# Altium PCB AT_Link_ISO_V1.0.PcbDoc
Units mm, origin at the board's own origin, x right, y up, seen from the top; angles counter-clockwise.
Board outline 62.5 x 25.98 mm, 2 copper layers (Top Layer, Bottom Layer); 66 components, 72 nets, 268 pads, 191 vias.
Unrouted connection lines stored in the file: 35.
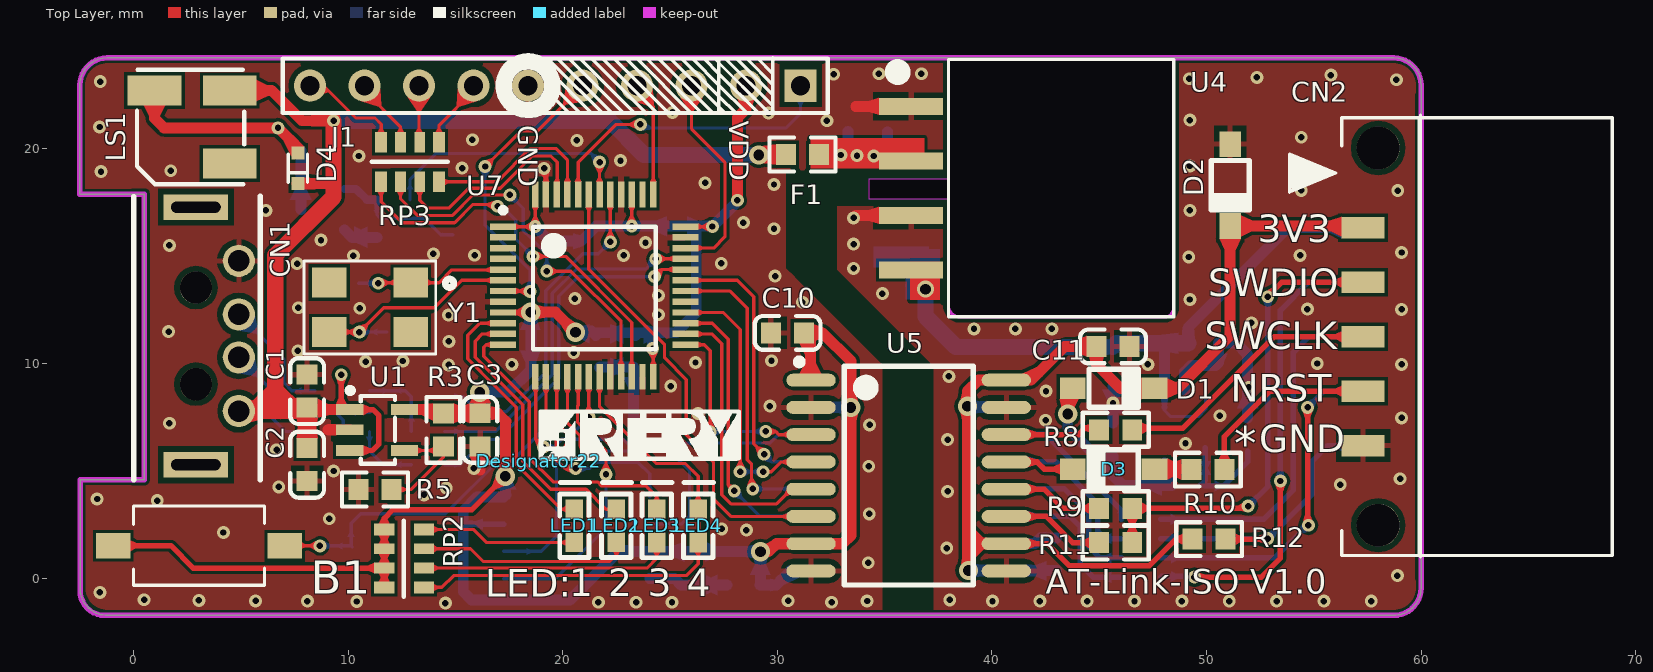
[diagram p0: Top Layer view]
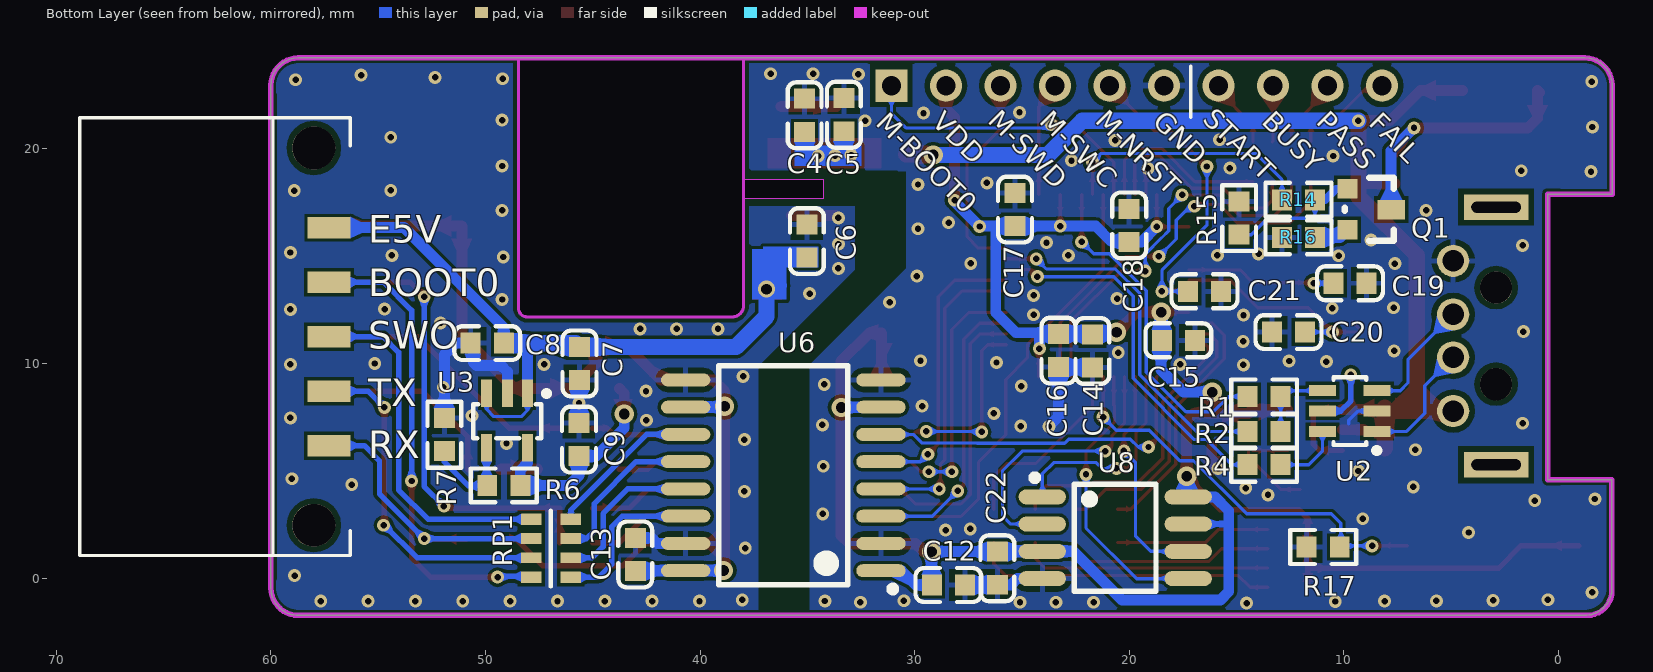
[diagram p1: Bottom Layer view, seen from below]
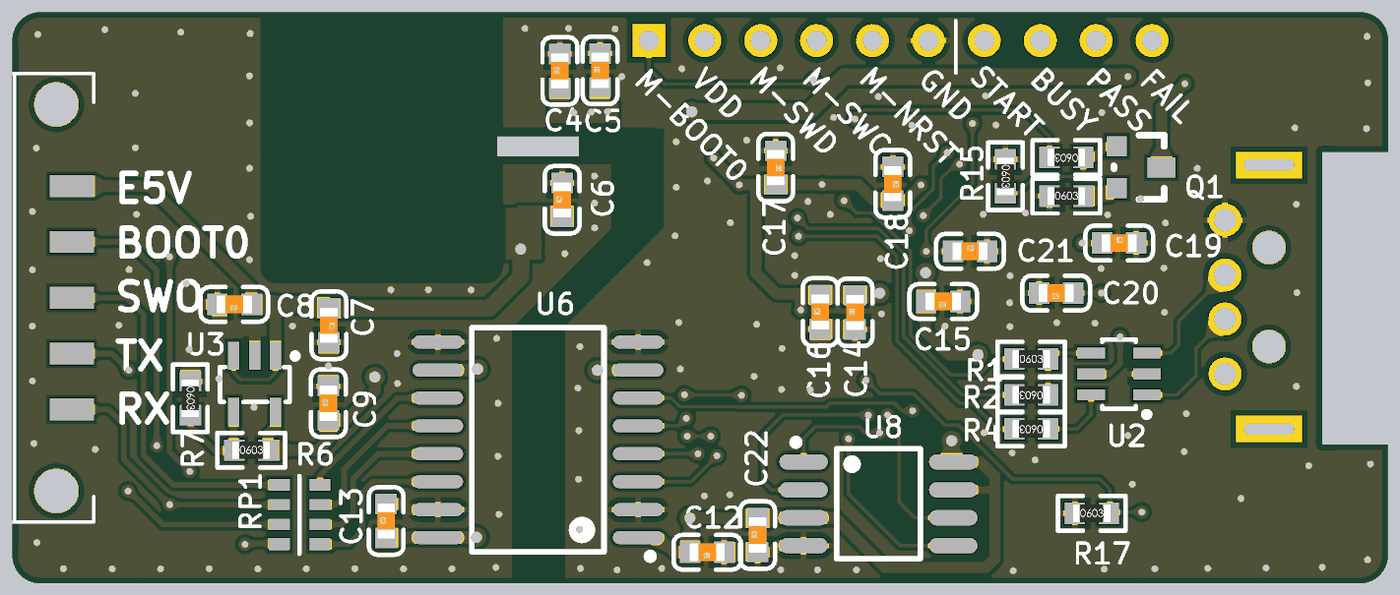
[diagram p2: 3D render of the assembled board from below, using the file's embedded part models]

## Layer stack, top to bottom
Top Solder: solder mask 0.0102, Solder Resist, Dk 3.5
Top Layer: signal copper 0.0356
Dielectric1: dielectric 0.32, FR-4, Dk 4.8
Bottom Layer: signal copper 0.0356
Bottom Solder: solder mask 0.0102, Solder Resist, Dk 3.5

## Board outline
-2.492,-0.469 -2.492,4.58 0.5,4.58 0.5,17.882 -2.5,17.882 -2.5,22.968 cw(c-1.23,22.968) -1.23,24.238 58.73,24.238 cw(c58.73,22.968) 60,22.968 60,-0.469 cw(c58.73,-0.469) 58.73,-1.739 -1.222,-1.739 cw(c-1.222,-0.469)
cut-out: 37.973,24.238 37.973,12.7 ccw(c38.506,12.7) 38.506,12.167 48.041,12.167 ccw(c48.041,12.598) 48.473,12.598 48.473,24.223
cut-out: 34.265,17.678 37.973,17.678 37.973,18.593 34.265,18.593
cut-out: 34.267,18.573

## Design rules (kind name [scope] priority, off if disabled: settings)
BoardOutlineClearance [All] p1: gap=0.254 ignorepadtopadclearanceinfootprint=FALSE except(0: Arc-SplitContinuation Track-SplitContinuation SMDPad-SplitContinuation THPad-SplitContinuation Via-SplitContinuation Fill-SplitContinuation Poly-SplitContinuation Region-SplitContinuation Text-SplitContinuation)
Clearance [All] p1: gap=0.152 ignorepadtopadclearanceinfootprint=FALSE except(0.254: THPad-Poly)
ComponentClearance [All] p1: gap=0.127 collisioncheckmode=3 verticalgap=0.051 showdistances=TRUE
HoleSize [All] p1: absolutevalues=TRUE maxlimit=5 minlimit=0.3 maxpercent=80.000 minpercent=20.000
MinimumAnnularRing [All] p1: minimumring=0.102
MinimumSolderMaskSliver [All] p1: minsoldermaskwidth=0.076
PolygonConnect [All] p1: thpad.connectstyle=Relief thpad.reliefconductorwidth=0.254 thpad.reliefentries=4 thpad.polygonreliefangle="90 Angle" thpad.airgapwidth=0.254 smdpad.connectstyle=Relief smdpad.reliefconductorwidth=0.254 smdpad.reliefentries=4 smdpad.polygonreliefangle="90 Angle" smdpad.airgapwidth=0.254 via.connectstyle=Direct via.reliefconductorwidth=0.254 via.reliefentries=4 via.polygonreliefangle="90 Angle" via.airgapwidth=0.254
RoutingVias [All] p1: holewidth=0.3 width=0.6 viastyle="Through Hole" minholewidth=0.3 minwidth=0.6 maxholewidth=1.27 maxwidth=2.54
SilkToSilkClearance [All] p1: silktosilkclearance=0.025
SilkToSolderMaskClearance [IsPad] p1: minsilkscreentomaskgap=0.025 clearancetoexposedcopper=TRUE
SolderMaskExpansion [All] p1: expansion=0.051
Width [All] p1: maxlimit=2.54 minlimit=0.152 preferedwidth=0.152
25 further rules are at their usual default settings.

## Classes and differential pairs
component class 1-AT_Link-ISO_Interface: C1 C2 C3 C4 C5 C6 C7 C8 C9 C10 C11 C12 C13 CN1 CN2 D1 D2 D3 F1 R1 R2 R3 R4 R5 R6 R7 R8 R9 R10 R11 R12 RP1 U1 U2 U3 U4 U5 U6
component class 2-AT_Link-ISO_MCU: B1 C14 C15 C16 C17 C18 C19 C20 C21 C22 D4 J1 LED1 LED2 LED3 LED4 LS1 Q1 R14 R15 R16 R17 RP2 RP3 U7 U8 Y1

## Components (designator, comment, footprint, x,y, rotation, side; value= is the part's Value field where it differs from the comment)
B1 "Button,SMD_2P" Button_3*6*2.5 3.051,1.508 r0 top locked
C1 "10uF" 0603_c 8.09,8.71 r90 top
C2 "0.1uF" 0603_c 8.09,5.282 r270 top
C3 "10uF" 0603_c 16.154,6.909 r270 top
C4 "10uF" 0603_c 35.128,21.566 r90 bottom
C5 "0.1uF" 0603_c 33.299,21.59 r90 bottom
C6 "10uF" 0603_c 35.022,15.702 r90 bottom
C7 "10uF" 0603_c 45.618,9.997 r270 bottom
C8 "0.1uF" 0603_c 49.919,10.947 r0 bottom
C9 "10uF" 0603_c 45.645,6.452 r90 bottom
C10 "0.1uF" 0603_c 30.48,11.424 r0 top
C11 "0.1uF" 0603_c 45.644,10.795 r0 top
C12 "0.1uF" 0603_c 28.432,-0.325 r0 bottom
C13 "0.1uF" 0603_c 43.021,1.096 r90 bottom
C14 "4.7uF" 0603_c 21.718,10.583 r90 bottom value=4.7uf
C15 "0.1uF" 0603_c 17.713,11.078 r0 bottom value=0.1uf
C16 "0.1uF" 0603_c 23.297,10.6 r90 bottom value=0.1uf
C17 "0.1uF" 0603_c 25.324,17.17 r270 bottom value=0.1uf
C18 "0.1uF" 0603_c 20.004,16.434 r270 bottom value=0.1uf
C19 "22pF" 0603_c 9.717,13.737 r180 bottom
C20 "22pF" 0603_c 12.581,11.463 r0 bottom
C21 "0.1uF" 0603_c 16.495,13.36 r180 bottom
C22 "0.1uF" 0603_c 26.145,0.458 r90 bottom value=0.1uf
CN1 "USB-A 90°弯针" "USB_A - DIP" 4.907,14.782 r270 top locked
CN2 "CON1" SWD_2*5P_SMT 57.302,11.25 r270 top locked
D1 "DFLS130L" SOD-123 45.669,8.839 r180 top
D2 "SMF3.3A" SOD-123 51.105,18.313 r90 top
D3 "DFLS130L" SOD-123 45.669,5.08 r0 top
D4 "RB521S-30" SOD-523 7.662,19.093 r90 top
Designator22 "Comment" log_small 18.889,5.475 r0 top
F1 "SMD0603B025TF" 0603_r 31.173,19.736 r180 top
J1 "NC" HDR1X10 31.083,22.944 r180 top locked
LED1 "RED" LED0603 20.551,1.661 r90 top
LED2 "GREEN" LED0603 22.506,1.661 r90 top
LED3 "BLUE" LED0603 24.386,1.66 r90 top
LED4 "YELLOW" LED0603 26.317,1.66 r90 top
LS1 "MLT-5030贴片无源蜂鸣器" "BUZZER - 5030" 4.479,22.715 r90 top
Q1 "S8050" SOT-23 9.834,18.138 r270 bottom
R1 "NC" 0603_r 13.716,8.458 r180 bottom
R2 "22R" 0603_r 13.716,6.832 r0 bottom
R3 "47K" 0603_r 14.441,6.904 r90 top
R4 "22R" 0603_r 13.716,5.282 r0 bottom
R5 "15K" 0603_r 11.252,4.128 r0 top
R6 "51K" 0603_r 49.149,4.318 r180 bottom
R7 "15K" 0603_r 51.918,6.68 r270 bottom
R8 "100R" 0603_r 45.771,6.909 r180 top
R9 "470R" 0603_r 45.771,3.251 r180 top
R10 "100R" 0603_r 50.063,5.055 r180 top
R11 "100R" 0603_r 45.771,1.651 r180 top
R12 "100K" 0603_r 50.123,1.816 r0 top
R14 "470R" 0603_r 12.116,17.628 r0 bottom
R15 "100K" 0603_r 14.884,16.772 r270 bottom
R16 "33R" 0603_r 12.116,15.875 r180 bottom
R17 "100K" 0603_r 10.962,1.446 r180 bottom
RP1 "100R" 0603*4,8P4R 46.025,0.04 r90 bottom
RP2 "1K" RP_4-0603 13.534,-0.435 r180 top
RP3 "100R" 0603*4,8P4R 11.538,18.466 r0 top
U1 "RT9080N-08GJ5" SOT-23-5#1 11.733,5.308 r0 top
U2 "USBLC6-2SC6" SOT-23-6 9.725,7.782 r180 bottom
U3 "RT9080N-08GJ5" SOT-23-5#2 48.997,7.341 r90 bottom
U4 "B0505S-1WR3" B0505S-1WR3-B 35.433,18.167 r270 top locked
U5 "ADUM1401CRW" SOIC-16_300mil 36.123,4.775 r270 top locked
U6 "ADUM1402CRW" SOIC-16_300mil 36.123,4.788 r90 bottom locked
U7 "AT32F403CGT6" "LQFP48 - 2" 17.218,16.375 r0 top locked
U8 "W25Q128" SOIC-8_208mil 20.654,1.878 r270 bottom locked
Y1 "8MHz" XTAL_5032 12.92,13.763 r180 top locked

## Footprints (in the part's own frame and the unit in brackets; to place one, negate y for a bottom-side part, rotate by r counter-clockwise, add the part's x,y. Pads: shape width x height; smd on the part's side, far side on the other; paste and mask are expansions set on the pad)
0603*4,8P4R [mm] "贴片排阻，0603*4，8P4R"
  rect 0.55x0.95 smd: 1(0,0) 4(2.7,0) 5(2.7,1.85) 8(0,1.85)
  rect 0.5x0.95 smd: 2(0.9,0) 3(1.8,0) 6(1.8,1.85) 7(0.9,1.85)
  silkscreen extent -0.43,0.94 3.1,0.94
0603_c [mm]
  rect 0.93x0.98 smd: 1(-0.77,0) 2(0.77,0)
  silkscreen extent -1.53,-0.79 1.54,0.79, body extent -0.8,-0.4 0.8,0.4, height 0.3
0603_r [mm]
  rect 0.93x0.98 smd: 1(-0.77,0) 2(0.77,0)
  silkscreen extent -1.53,-0.79 1.54,0.79, body extent -0.85,-0.4 0.85,0.4, height 0.56
B0505S-1WR3-B [mm] "B0505S-1WR3 5V 1W  Isolation power module"
  rect 0.8x3 smd: 1(-3.81,0.8) 2(-1.27,0.8) 3(1.27,0.8) 4(3.81,0.8)
  silkscreen extent -6,0.08 5.99,13.04
Button_3*6*2.5 [mm] "Button"
  rect 1.6x1.2 smd: 1(-4,0) 2(4,0)
  silkscreen extent -3.05,-1.85 3.05,1.85
"BUZZER - 5030" [mm]
  rect 1.4x2.5 smd: 1(0,0) 2(0,3.5) 3(-3.4,0)
  silkscreen extent -4.37,-0.69 0.97,4.32
HDR1X10 [mm] "Connector; Header; 10 Position"
  rect 1.5x1.5 hole 0.9: 1(0,0)
  round 1.5 hole 0.9: 2(2.54,0) 3(5.08,0) 4(7.62,0) 5(10.16,0) 6(12.7,0) 7(15.24,0) 8(17.78,0) 9(20.32,0) 10(22.86,0)
  silkscreen extent -1.27,-1.27 24.13,1.27
LED0603 [mil]
  rect 36x32 smd: 1(-0.04,0.2) 2(60.96,0.2)
  silkscreen extent -28,-28 110,27
log_small [mm]
  silkscreen extent 0.08,0.08 9.32,2.29
"LQFP48 - 2" [mm] "DPIN-0.5"
  rect 1.2x0.3 smd: 1(0,0) 2(0,-0.5) 3(0,-1) 4(0,-1.5) 5(0,-2) 6(0,-2.5) 7(0,-3) 8(0,-3.5) 9(0,-4) 10(0,-4.5) 11(0,-5) 12(0,-5.5) 25(8.5,-5.5) 26(8.5,-5) 27(8.5,-4.5) 28(8.5,-4) 29(8.5,-3.5) 30(8.5,-3) 31(8.5,-2.5) 32(8.5,-2) 33(8.5,-1.5) 34(8.5,-1) 35(8.5,-0.5) 36(8.5,0)
  rect 0.3x1.2 smd: 13(1.5,-7) 14(2,-7) 15(2.5,-7) 16(3,-7) 17(3.5,-7) 18(4,-7) 19(4.5,-7) 20(5,-7) 21(5.5,-7) 22(6,-7) 23(6.5,-7) 24(7,-7) 37(7,1.5) 38(6.5,1.5) 39(6,1.5) 40(5.5,1.5) 41(5,1.5) 42(4.5,1.5) 43(4,1.5) 44(3.5,1.5) 45(3,1.5) 46(2.5,1.5) 47(2,1.5) 48(1.5,1.5)
  silkscreen extent -0.12,-5.71 7.11,0.89
RP_4-0603 [mm]
  rect 0.95x0.55 smd: 1(0,0) 4(0,-2.7) 5(1.85,-2.7) 8(1.85,0)
  rect 0.95x0.5 smd: 2(0,-0.9) 3(0,-1.8) 6(1.85,-1.8) 7(1.85,-0.9)
  silkscreen extent 0.94,-3.1 0.94,0.43
SOD-123 [mm]
  rect 1.2x1 smd: 1(1.905,0) 2(-1.905,0)
  silkscreen extent -1.14,-0.89 1.14,0.89
SOD-523 [mm] "SOD-523"
  rect 0.6x0.6 smd: 1(0.71,0) 2(-0.71,0)
  silkscreen extent -0.65,-0.45 0.65,0.45
SOIC-8_208mil [mm]
  oval 0.7x2.2 smd: 1(-1.905,-3.4) 2(-0.635,-3.4) 3(0.635,-3.4) 4(1.905,-3.4) 5(1.905,3.4) 6(0.635,3.4) 7(-0.635,3.4) 8(-1.905,3.4)
  silkscreen extent -2.95,-3.9 2.5,1.9
SOIC-16_300mil [mm]
  oval 0.6x2.3 smd: 1(-4.445,-4.55) 2(-3.175,-4.55) 3(-1.905,-4.55) 4(-0.635,-4.55) 5(0.635,-4.55) 6(1.905,-4.55) 7(3.175,-4.55) 8(4.445,-4.55) 9(4.445,4.55) 10(3.175,4.55) 11(1.905,4.55) 12(0.635,4.55) 13(-0.635,4.55) 14(-1.905,4.55) 15(-3.175,4.55) 16(-4.445,4.55)
  silkscreen extent -5.45,-5.25 5.1,3
SOT-23 [mil]
  rect 36x36 smd: 1(0.11,0.15) 2(75.11,0.15)
  rect 36x50 smd: 3(38.11,80.15)
  silkscreen extent -20,-5 95,85
SOT-23-5#1 [mil]
  rect 50x20 smd: 1(-65,100) 2(-65,63) 3(-65,25) 4(35,25) 5(35,100)
  silkscreen extent -65,1 18,135
SOT-23-5#2 [mil]
  rect 50x20 smd: 1(50,-37.5) 2(50,-0.5) 3(50,37.5) 4(-50,37.5) 5(-50,-37.5)
  silkscreen extent -33,-72 50,62
SOT-23-6 [mil]
  rect 50x20 smd: 1(50,-37.4) 2(50,0) 3(50,37.4) 4(-50,37.4) 5(-50,0) 6(-50,-37.4)
  silkscreen extent -30,-72 50,62
SWD_2*5P_SMT [mm]
  rect 1x2 smd: 1(-5.08,0) 3(-2.54,0) 5(0,0) 7(2.54,0) 9(5.08,0)
  rect 1x2 smd far side: 2(-5.08,0) 4(-2.54,0) 6(0,0) 8(2.54,0) 10(5.08,0)
  silkscreen extent -10.2,-3.43 10.2,11.6
"USB_A - DIP" [mm]
  round 1.5 hole 1: 1(7,0) 2(4.5,0) 3(2.5,0) 4(0,0)
  rect 1.2x3 hole 0.52 slot 2.3 at 90 deg: 5(-2.5,-2) 6(9.5,-2)
  round 1.5 hole 1.5: 7(1.25,-2) 8(5.75,-2)
  silkscreen extent -3,-4.9 10.2,1
XTAL_5032 [mm]
  rect 1.6x1.4 smd: 1(0,0) 2(3.8,0) 3(3.8,2.3) 4(0,2.3)
  silkscreen extent -2,-1.02 4.98,3.33

## Part data
B1: library part Push_Bottom,Blue,SMD_2P, "两脚SMT贴片轻触开关3.5*6*5  黑色"
C1 C3 C4 C6 C7 C9: library part 0.1uF,50V,20%,SMD0603, "贴片陶瓷电容 10uF,16V,10%,X7R,SMD0603"
C2 C5 C8 C10 C11 C12 C13 C21: library part 0.1uF,50V,20%,SMD0603, "贴片陶瓷电容 0.1uF,16V,10%,X7R,SMD0603"
C14: library part "Cap Semi", "贴片陶瓷电容4.7uF,16V,10%,X7R,SMD0603", LatestRevisionDate=29-May-2009, LatestRevisionNote="IPC-7351 Footprint Added.", PackageDescription="Chip Capacitor", PackageReference=C1206, Published=8-Jun-2000, Publisher="Altium Limited"
C15 C16 C17 C18 C22: library part "Cap Semi", "贴片陶瓷电容 0.1uF,16V,10%,X7R,SMD0603", LatestRevisionDate=29-May-2009, LatestRevisionNote="IPC-7351 Footprint Added.", PackageDescription="Chip Capacitor", PackageReference=C1206, Published=8-Jun-2000, Publisher="Altium Limited"
C19 C20: library part 10pF,50V,5%,SMD0603, "贴片陶瓷电容 22pF,50V,5%,COG,SMD0603"
CN1: library part "Header 4", "USB-A公头 /90°脚/直插式", LatestRevisionDate=17-Jul-2002, LatestRevisionNote="Re-released for DXP Platform.", Publisher="Altium Limited"
CN2: library part CON10A_0, "简易牛角DC3-10P 直针 2.54mm 2*5P双排 黑色"
D1 D3: library part Diode, "贴片二极管 DFLS130L-7", Code_JEDEC=DO-214-AB, LatestRevisionDate=17-Jul-2002, LatestRevisionNote="Re-released for DXP Platform.", PackageDescription="DO-214-AB/SMC; 2 C-Bend Leads; Body 7.9 x 5.9 mm, inc. leads (LxW)", PackageReference=SMC, PackageVersion=Sep-1996, Published=8-Jun-2000, Publisher="Altium Limited"
D2: "TVS管SMF3.3A"
D4: library part Diode, "贴片二极管 RB521S-30 SOD-523", Code_JEDEC=DO-214-AB, LatestRevisionDate=17-Jul-2002, LatestRevisionNote="Re-released for DXP Platform.", PackageDescription="DO-214-AB/SMC; 2 C-Bend Leads; Body 7.9 x 5.9 mm, inc. leads (LxW)", PackageReference=SMC, PackageVersion=Sep-1996, Published=8-Jun-2000, Publisher="Altium Limited"
F1: library part "Fuse 1", "SMD0603B025TF 可恢复保险丝", LatestRevisionDate=17-Jul-2002, LatestRevisionNote="Re-released for DXP Platform.", PackageDescription="Thru-Hole; 2 Leads", PackageReference=PIN-W2/E2.8, Published=8-Jun-2000, Publisher="Altium Limited"
J1: library part "Header 10", "单排直插针2.54mm", LatestRevisionDate=17-Jul-2002, LatestRevisionNote="Re-released for DXP Platform.", Publisher="Altium Limited"
LED1: library part RED,SMD0603, "贴片LED  红色 0603"
LED2: library part GREEN,SMD0603, "贴片LED  绿色 0603"
LED3: library part RED,SMD0603, "贴片LED  蓝色 0603"
LED4: library part YELLOW,SMD0603, "贴片LED  黄色 0603"
LS1: library part Bell, LatestRevisionDate=17-Jul-2002, LatestRevisionNote="Re-released for DXP Platform.", PackageReference=PIN2, Published=24-Mar-1999, Publisher="Altium Limited"
Q1: library part NPN, "三极管SS8050 SOT-23"
R1: library part 10K,1/10W,1%,SMD0603_Dup1
R2 R4: library part 22,1/10W,1%,SMD0603, "贴片电阻 22R 5% 1/10W 0603"
R3: library part 470,1/10W,1%,SMD0603, "贴片电阻 47K 1% 1/10W 0603"
R5 R7: library part 470,1/10W,1%,SMD0603, "贴片电阻 15K 1% 1/10W 0603"
R6: library part 470,1/10W,1%,SMD0603, "贴片电阻 51K 1% 1/10W 0603"
R8 R10 R11: library part 22,1/10W,1%,SMD0603, "贴片电阻 100R 5% 1/10W 0603"
R9: library part 22,1/10W,1%,SMD0603, "贴片电阻 470R 5% 1/10W 0603"
R12: library part 22,1/10W,1%,SMD0603, "贴片电阻 100K 5% 1/10W 0603"
R14: library part 470,1/10W,1%,SMD0603, "贴片电阻 470R 5% 1/10W 0603"
R15: library part 470,1/10W,1%,SMD0603, "贴片电阻 100K 5% 1/10W 0603"
R16: library part 470,1/10W,1%,SMD0603, "贴片电阻 33R 5% 1/10W 0603"
R17: library part 10K,1/10W,1%,SMD0603, "贴片电阻 100K 5% 1/10W 0603"
RP1 RP3: library part 22,1/16W,5%,8P4R, "贴片排阻 100R 5% 1/16W 0603"
RP2: library part 22,1/16W,5%,8P4R, "贴片排阻 1K 5% 1/16W 0603"
U1 U3: library part RT9080N
U7: library part LQFP48&QFN48
U8: library part W25Q128FVSIQ,SOIC8_1, "W25Q128JVSIQTR"
Y1: library part "SMD-5032_4P  8MHZ 20PF 10PPM", "无源晶振8MHz TZ0211E 5032_4,20pF,20PPM", Package=SMD-3225_4P, SuppliersPartNumber=C9002, ComponentLink1Description=供应商链接, ComponentLink1URL=http://www.szlcsc.com/product/details_9522.html, Supplier=LC

## Free pads (board coordinates)
  round 2 hole 2: 0(58,2.46) 0(58,20.04)

## Via types
v1: diameter 0.6, hole 0.3, Top Layer to Bottom Layer, tented both sides, 180 vias
v2: diameter 0.9, hole 0.5, Top Layer to Bottom Layer, tented both sides, 10 vias
v3: diameter 0.8, hole 0.5, Top Layer to Bottom Layer, tented both sides, 1 vias

## Nets (pads, with @x,y where several pads share a name; then routed paths per layer and width w, separated by ;. In a path a pad name is that pad's centre, name@x,y a point inside that pad or via, vN(x,y) a via of type N, cw(c..) or ccw(c..) an arc to the next point about the centre after c; other vN are vias at no path point)
5V_ISO: C6.1 C7.1 C8.1 CN2.2 U3.1 U3.3 U4.4 | length 31.5
  Bottom Layer w0.152: U3.1 48.044,7.819 48.338,7.525 49.616,7.525 49.949,7.858 U3.3
  Bottom Layer w0.254: 47.923,10.947 48.044,10.826
  Bottom Layer w0.508: U3.1 48.044,10.826 ; C8.1 49.149,11.675 53.803,16.33 CN2.2
  Bottom Layer w0.762: 36.326,13.629 36.493,13.462 v3(36.906,13.462) 36.906,12.19 38.326,10.77 C7.1@45.348,10.77 ; C7.1 45.799,10.947 47.923,10.947 C8.1
ATLK_BOOT0: U6.3 U7.27 | length 13.6
  Top Layer w0.152: U7.27 26.974,11.875 27.713,11.136 27.713,4.342 v1(27.991,4.064)
  Bottom Layer w0.152: v1(27.991,4.064) 29.172,2.883 U6.3
ATLK_NRST: U5.4 U7.28 | length 13
  Top Layer w0.152: U7.28 27.478,12.375 28.27,11.582 v1(28.27,4.953) ; v1(29.342,4.953) 29.723,4.953 30.18,5.41 U5.4
  Bottom Layer w0.152: v1(28.27,4.953) v1(29.342,4.953)
ATLK_RX: U6.5 U7.31 | length 13.4
  Top Layer w0.152: U7.31 28.137,13.875 28.905,13.106 28.905,6.248 v1(29.388,5.766)
  Bottom Layer w0.152: v1(29.388,5.766) 29.731,5.423 U6.5
ATLK_SWCLK: U5.3 U7.25 | length 10.2
  Top Layer w0.152: U7.25 26.59,10.875 26.873,10.592 v1@26.873,6.68 ; v1(29.464,6.833) 29.919,6.833 30.072,6.68 U5.3 U5.3@31.421,6.833
  Bottom Layer w0.152: v1(26.873,6.807) 26.924,6.756 27,6.833 v1(29.464,6.833)
ATLK_SWDIO_I: U5.6 U7.43 | length 21.5
  Top Layer w0.152: U7.43 21.218,14.39 24.387,11.221 24.405,11.221 24.745,10.882 24.745,10.256 25.756,9.246 25.756,6.68 27.026,5.41 27.026,3.685 27.84,2.87 U5.6
ATLK_SWDIO_O: U5.5 U7.26 | length 13.5
  Top Layer w0.152: U7.26 26.954,11.375 27.408,10.92 27.408,3.884 27.84,3.453 29.967,3.453 30.655,4.14 U5.5
ATLK_SWO: U6.6 U7.13 | length 16.3
  Top Layer w0.152: U7.13 18.745,9.348 18.745,6.466 v1(19.105,6.106)
  Bottom Layer w0.152: v1(19.105,6.106) 19.589,6.106 19.955,6.472 22.822,6.472 23.016,6.279 27.092,6.279 27.108,6.294 29.673,6.294 30.072,6.693 U6.6
ATLK_TX: U6.4 U7.30 | length 14.5
  Top Layer w0.152: U7.30 27.798,13.375 28.6,12.573 28.6,5.507 28.799,5.309 28.799,4.208 v1(28.854,4.153)
  Bottom Layer w0.152: v1(28.854,4.153) U6.4
BOOT0: J1.1 U7.44 | length 14
  Top Layer w0.152: U7.44 20.718,19.372 22.485,21.139 v1(23.622,21.139)
  Bottom Layer w0.152: v1(23.622,21.139) 23.794,20.968 30.385,20.968 31.083,21.666 J1.1@31.083,22.715
BUZZ: R14.2 U7.42 | length 12
  Top Layer w0.152: U7.42 v1(21.718,19.38)
  Bottom Layer w0.152: R14.2 12.886,18.575 14.097,19.787 21.312,19.787 v1(21.718,19.38)
DM: CN1.2 U2.1 | length 5.7
  Bottom Layer w0.152: CN1.2 6.227,8.962 6.227,7.685 7.08,6.832 U2.1
DP: CN1.3 U2.3 | length 5.7
  Bottom Layer w0.152: CN1.3 7.014,10.176 7.014,9.089 7.371,8.732 U2.3
EGND: C6.2 C7.2 C8.2 C9.2 C11.2 C13.2 CN2.9 D2.1 R7.1 U3.2 U4.3 U5.9 U5.15 U6.9 U6.15 | length 14.6
  Top Layer w0.508: v1(33.553,16.784) 33.666,16.897 U4.3@35.733,16.897
  Bottom Layer w0.508: U6.15 42,1.613 42.253,1.866 C13.2 ; C9.2@45.644,7.222 C7.2@45.644,8.933 ; U3.2 48.984,9.614 49.276,9.906 50.414,9.906 50.554,10.046 50.554,10.947 51.384,10.947 51.918,10.414 R7.1
  other v1: 40.027,-1.078 42.234,-1.078 44.44,-1.078 46.646,-1.078 48.853,-1.078 51.059,-1.078 53.265,-1.078 55.472,-1.078 57.678,-1.078 38.034,-1.016 58.894,0.114 37.897,1.397 37.937,4.039 56.236,4.356 59.025,4.625 49.022,6.274 37.937,6.448 42.503,7.354 59.095,7.466 50.622,7.563 45.644,8.153 42.521,8.71 51.968,8.89 37.998,9.398 47.269,9.96 59.095,9.959 55.162,9.997 39.167,11.608 41.097,11.609 42.799,11.609 52.095,11.887 59.095,12.522 54.699,12.529 49.225,12.979 34.9,13.256 33.553,14.427 49.174,14.961 54.36,15.038 59.095,15.169 33.553,15.561 49.225,17.134 58.912,18.056 54.414,18.065 49.225,19.202 54.414,20.54 49.225,21.336 58.848,23.221 49.2,23.266 52.351,23.33 55.799,23.439
FLASH_CS: U7.14 U8.1 | length 10
  Top Layer w0.152: U7.14 19.218,7.248 19.682,6.784 19.682,5.529 20.104,5.107 v1(20.598,5.107)
  Bottom Layer w0.152: v1(20.598,5.107) 21.267,5.107 21.539,5.379 23.531,5.379 24.054,4.856 U8.1
GND: C1.2 C2.2 C3.2 C4.2 C5.2 C10.1 C12.1 C14.1 C15.1 C16.1 C17.1 C18.1 C19.2 C20.2 C21.2 C22.1 CN1.4 J1.6 R5.1 R15.1 R16.1 R17.1 U1.2 U2.2 U4.1 U5.2 U5.8 U6.2 U6.8 U7.8 U7.20 U7.23 U7.35 U7.40 U7.47 U8.4 | length 16
  Top Layer w0.152: v1(19.131,19.093) 19.218,19.005 U7.47
  Top Layer w0.5: 9.047,6.909 U1.2 ; 16.154,5.017 C3.2 ; 33.649,21.977 U4.1
  Bottom Layer w0.152: U2.2 9.347,7.782 9.777,7.352 9.777,7.178
  Bottom Layer w0.5: C14.1 21.735,9.83 C16.1 23.297,7.513 v1(23.749,7.061)
  Bottom Layer w0.508: v1(20.564,13.023) v1@20.615,12.972 ; U8.4 25.219,-0.027 25.516,-0.325 C12.1
  other v1: 14.529,-1.165 21.66,-1.128 23.419,-1.128 25.092,-1.128 32.533,-1.128 10.402,-1.092 5.69,-1.067 8.103,-1.077 34.188,-1.069 3.048,-1.041 30.501,-1.061 0.491,-1.01 -1.571,-0.667 34.239,0.711 4.187,2.123 28.56,2.231 27.408,2.29 9.119,2.765 34.282,2.991 1.104,3.606 -1.701,3.683 13.535,3.875 14.575,4.191 6.766,4.25 9.322,4.988 15.861,5.107 34.259,5.209 6.667,5.978 25.055,7.081 34.302,7.137 1.669,7.215 26.308,7.671 29.654,8.009 25.033,8.942 34.216,9.026 14.681,9.931 17.633,9.96 26.187,10.045 10.814,10.089 12.549,10.114 29.73,10.129 20.513,10.509 7.662,10.583 14.697,11.024 1.637,11.483 14.679,12.253 24.456,12.271 10.541,12.573 7.682,12.598 31.166,12.852 24.456,13.17 29.896,14.072 7.62,14.655 27.387,14.663 10.242,15.02 22.839,15.036 15.892,15.044 13.974,15.106 1.669,15.501 23.857,15.634 8.737,15.748 29.845,16.275 28.423,16.561 6.166,17.134 29.845,18.339 26.638,18.416 -1.517,18.939 1.737,18.981 15.314,19.101 22.694,19.452 10.502,19.668 20.661,20.396 15.79,20.425 -1.582,21.019 32.312,21.311 29.591,21.666 25.117,21.698 -1.549,23.131 32.624,23.477 34.733,23.498 36.717,23.498
KEY1: B1.2 R17.2 U7.18 | length 19.3
  Top Layer w0.152: B1.2 8.677,1.508 v1(8.687,1.499) ; v1(21.218,7.502) U7.18 U7.18@21.247,9.346
  Bottom Layer w0.152: v1(8.687,1.499) R17.2@10.14,1.499 ; R17.2 R17.2@10.14,1.499 ; v1(21.218,7.502) 20.605,6.889 19.064,6.889 17.64,5.465 17.007,5.465 14.532,2.991 10.581,2.991 10.14,2.55 R17.2@10.14,1.499
LED1: LED1.2 U7.10 | length 12.4
  Top Layer w0.152: U7.10 16.129,11.875 15.57,11.316 15.57,10.216 16.844,8.942 16.847,8.942 17.831,7.958 17.831,5.307 19.928,3.209 LED1.2
LED2: LED2.2 U7.11 | length 13.2
  Top Layer w0.152: U7.11 16.256,11.375 15.926,11.045 15.926,10.294 18.136,8.085 18.136,5.433 19.437,4.132 21.09,4.132 22.013,3.209 LED2.2
LED3: LED3.2 U7.12 | length 14.3
  Top Layer w0.152: U7.12 16.443,10.875 16.32,10.752 16.32,10.332 17.218,9.433 18.44,8.211 18.44,5.586 19.549,4.478 21.624,4.478 21.798,4.304 23.874,4.304 24.381,3.797 LED3.2
LED4: LED4.2 U7.19 | length 8.9
  Top Layer w0.152: U7.19 21.718,7.976 24.357,5.337 25.721,5.337 26.312,4.746 LED4.2
NetC4_1: C4.1 C5.1 F1.1 U4.2 | length 2.2
  Bottom Layer w0.508: 33.299,19.761 C5.1 ; 35.128,19.66 C4.1
  other v1: 33.713,19.685 34.493,19.668 32.963,19.713
NetC19_1: C19.1 U7.5 Y1.1 | length 7
  Top Layer w0.152: v1(11.405,13.737) 11.43,13.763 Y1.1 14.24,13.763 14.834,14.357 17.212,14.357 U7.5@17.218,14.363
  Bottom Layer w0.152: C19.1 v1(11.405,13.737)
NetC20_1: C20.1 U7.6 Y1.3 | length 11.1
  Top Layer w0.152: Y1.3@9.603,11.945 Y1.3 v1(10.523,11.463) 11.659,12.598 14.011,12.598 15.288,13.875 U7.6
  Bottom Layer w0.152: v1(10.523,11.463) C20.1
NetD3_1: D3.1 R10.2 | length 1.7
  Top Layer w0.508: D3.1 49.268,5.08 R10.2
NetD3_2: D3.2 U5.13 | length 3.2
  Top Layer w0.254: U5.13 42.111,5.41 42.365,5.156 42.441,5.08 D3.2
NetD4_1: D4.1 LS1.2 Q1.3 | length 13.2
  Top Layer w0.508: LS1.2@0.889,22.626 LS1.2 0.979,21.424 1.422,20.98 v1(6.731,20.98) 7.662,20.05 D4.1
  Bottom Layer w0.508: v1(6.731,20.98) 7.798,19.914 Q1.3
NetJ1_7: J1.7 RP3.5 | length 3.1
  Top Layer w0.152: RP3.5 14.238,21.11 J1.7@15.843,22.715
NetJ1_8: J1.8 RP3.6 | length 2.4
  Top Layer w0.152: J1.8@13.303,22.715 13.303,20.351 RP3.6
NetJ1_9: J1.9 RP3.7 | length 3.1
  Top Layer w0.152: J1.9@10.763,22.715 12.438,21.04 RP3.7
NetJ1_10: J1.10 RP3.8 | length 4.8
  Top Layer w0.152: J1.10@8.223,22.715 9.085,22.715 10.363,21.438 11.252,21.438 11.538,21.152 RP3.8
NetLED1_1: LED1.1 RP2.4 | length 7.3
  Top Layer w0.152: RP2.4 15.832,2.265 16.437,1.66 LED1.1
NetLED2_1: LED2.1 RP2.3 | length 9.9
  Top Layer w0.152: RP2.3 15.704,1.365 16.299,0.77 22.196,0.77 22.501,1.075 LED2.1
NetLED3_1: LED3.1 RP2.2 | length 11.8
  Top Layer w0.152: RP2.2 23.928,0.465 24.381,0.918 LED3.1
NetLED4_1: LED4.1 RP2.1 | length 14.2
  Top Layer w0.152: RP2.1 14.373,-0.435 14.922,0.114 25.755,0.114 26.312,0.671 LED4.1
NetQ1_1: Q1.1 R14.1 R15.2 | length 6.4
  Bottom Layer w0.152: R14.1 11.346,16.924 11.506,16.764 13.552,16.764 14.314,16.002 R15.2
  Bottom Layer w0.381: Q1.1 10.363,18.136 10.871,17.628 R14.1
NetQ1_2: Q1.2 R16.2 | length 1.7
  Bottom Layer w0.508: Q1.2 10.185,15.875 R16.2
NetR1_2: R1.2 R2.1 U2.4 | length 3.7
  Bottom Layer w0.152: U2.4 12.672,8.732 R1.2 R2.1
NetR3_1: R3.1 R5.2 U1.4 | length 5.4
  Top Layer w0.152: R5.2 12.943,4.128 14.441,5.625 R3.1 14.25,5.943 U1.4
NetR4_1: R4.1 U2.6 | length 3.1
  Bottom Layer w0.152: U2.6 10.995,5.922 11.634,5.282 R4.1
NetR6_1: R6.1 R7.2 U3.4 | length 5
  Bottom Layer w0.254: R6.1@49.919,4.293 50.801,4.293 51.918,5.409 R7.2 ; R6.1 49.716,4.318 49.949,4.551 U3.4
NetR8_2: R8.2 U5.14 | length 4.5
  Top Layer w0.254: U5.14 44.044,6.68 44.348,6.985 R8.2@45.001,6.985
NetR9_2: R9.2 U5.12 | length 4.7
  Top Layer w0.254: U5.12 42.436,4.14 43.325,3.251 R9.2
NetR11_2: R11.2 U5.11 | length 4.8
  Top Layer w0.254: U5.11 42.545,2.87 43.764,1.651 R11.2
NetRP1_1: RP1.1 U6.14 | length 7.6
  Bottom Layer w0.254: U6.14 43.623,2.883 44.112,2.394 44.112,0.644 44.716,0.04 RP1.1
NetRP1_2: RP1.2 U6.13 | length 7.6
  Bottom Layer w0.254: U6.13 43.373,4.153 44.518,3.008 44.518,1.46 45.038,0.94 RP1.2
NetRP1_3: RP1.3 U6.12 | length 7.6
  Bottom Layer w0.254: U6.12 42.978,5.423 44.932,3.468 44.932,2.202 45.295,1.84 RP1.3
NetRP1_4: RP1.4 U6.11 | length 7.2
  Bottom Layer w0.254: U6.11 42.494,6.693 46.025,3.162 RP1.4
NRST: C21.1 J1.5 U7.7 | length 15.3
  Top Layer w0.152: v1(16.383,19.177) 18.034,20.828 18.807,20.828 J1.5 ; U7.7 18.466,13.375 v1(18.48,13.36)
  Bottom Layer w0.152: v1(16.383,19.177) 16.383,16.434 18.48,14.336 v1(18.48,13.36) C21.1
PB8: RP3.4 U7.45 | length 8.5
  Top Layer w0.152: RP3.4 16.942,18.466 18.495,20.019 19.682,20.019 20.218,19.483 U7.45
PB9: RP3.3 U7.46 | length 10.1
  Top Layer w0.152: RP3.3 13.338,17.599 13.691,17.247 14.707,17.247 15.621,18.161 17.083,18.161 18.59,19.668 19.453,19.668 19.747,19.373 19.747,17.904 U7.46
PB10: RP3.2 U7.21 | length 17.9
  Top Layer w0.152: RP3.2 12.438,17.686 13.228,16.897 14.865,16.897 15.82,17.851 v1(17.539,17.851) ; v1(19.253,14.3) 20.379,14.3 22.718,11.961 U7.21
  Bottom Layer w0.152: v1(17.539,17.851) 17.539,17.843 18.161,17.221 18.161,16.185 18.499,15.846 18.505,15.846 19.253,15.099 v1(19.253,14.3)
PB11: RP3.1 U7.22 | length 18.8
  Top Layer w0.152: RP3.1 11.538,17.537 12.514,16.561 14.961,16.561 15.807,17.407 16.967,17.407 v1(16.967,17.323) ; v1(18.618,14.986) 20.14,14.986 23.218,11.908 U7.22
  Bottom Layer w0.152: v1(16.967,17.323) 16.983,17.323 17.069,17.408 17.805,16.672 17.805,15.799 v1(18.618,14.986)
SPI_MISO: U7.16 U8.2 | length 13.1
  Top Layer w0.152: U7.16 20.218,7.228 20.803,6.643 20.803,6.224 v1(21.119,5.908)
  Bottom Layer w0.152: v1(21.119,5.908) 21.129,5.918 24.998,5.918 25.908,5.009 25.908,2.894 25.527,2.513 U8.2
SPI_MOSI: U7.17 U8.5 | length 13.3
  Top Layer w0.152: U7.17 20.718,8.055 20.69,8.026 20.69,7.25 22.017,5.923 v1(22.017,4.833)
  Bottom Layer w0.152: U8.5 19.659,-0.027 22.017,2.33 v1(22.017,4.833)
SPI_SCK: U7.15 U8.6 | length 10.6
  Top Layer w0.152: U7.15 19.718,7.206 20.25,6.675 v1(20.25,5.922)
  Bottom Layer w0.152: U8.6 19.01,1.243 19.707,1.94 19.707,5.379 v1(20.25,5.922)
SWCLK: J1.4 U7.37 | length 5.2
  Top Layer w0.152: J1.4@23.463,22.715 24.218,21.96 U7.37
SWDIO: J1.3 U7.34 | length 9.7
  Top Layer w0.152: U7.34 27.034,15.375 27.559,15.9 27.559,19.368 26.003,20.924 J1.3
T-ATLK_BOOT0: CN2.4 RP1.8 | length 21.9
  Top Layer w0.254: v1(49.436,0.04) 52.556,0.04 53.442,0.926 v1(53.442,4.521)
  Bottom Layer w0.254: RP1.8 47.911,0.076 v1@49.436,0.076 ; v1(53.442,4.521) 53.442,12.471 54.76,13.79 CN2.4
T-ATLK_NRST: CN2.7 R10.1 | length 8.9
  Top Layer w0.254: R10.1 50.833,6.587 52.956,8.71 CN2.7
T-ATLK_RX: CN2.10 R12.2 RP1.6 | length 14.1
  Top Layer w0.254: R12.2 52.834,1.816 v1(52.857,1.84)
  Bottom Layer w0.254: RP1.6 v1(52.857,1.84) 54.94,3.923 54.94,5.461 55.649,6.17 CN2.10
T-ATLK_SWCLK: CN2.5 R8.1 | length 12.5
  Top Layer w0.254: R8.1@46.541,6.985 48.895,6.985 53.16,11.25 CN2.5
T-ATLK_SWDIO: CN2.3 R9.1 R11.1 | length 21.9
  Top Layer w0.254: R11.1 R9.1 51.841,3.251 v1(51.943,3.353) ; v1(52.857,13.106) 52.857,13.132 53.515,13.79 CN2.3
  Bottom Layer w0.254: v1(51.943,3.353) 52.857,4.267 v1(52.857,13.106)
T-ATLK_SWO: CN2.6 RP1.5 | length 16.7
  Bottom Layer w0.254: RP1.5 52.68,2.74 54.051,4.111 54.051,10.515 54.786,11.25 CN2.6
T-ATLK_TX: CN2.8 RP1.7 | length 15.9
  Top Layer w0.254: v1@54.714,2.459 v1@54.716,7.895
  Bottom Layer w0.254: RP1.7 53.179,0.94 54.722,2.483 v1(54.746,2.459) ; v1(54.714,7.952) 55.471,8.71 CN2.8
T_VCC: C11.1 C13.1 CN2.1 D1.2 D2.2 R12.1 U5.10 U5.16 U6.10 U6.16 | length 52.5
  Top Layer w0.254: U5.10 42.578,1.6 43.602,0.576 47.34,0.576 48.58,1.816 R12.1
  Top Layer w0.508: v2@38.862,0.356 38.862,1.6 ; v2@38.862,7.976 38.862,1.6 ; v2(38.862,8.001) 38.862,8.712 39.37,9.22 U5.16 41.822,9.22 43.397,10.795 C11.1 44.874,9.965 45.999,8.839 D1.2 48.641,8.839 51.105,11.303 D2.2 57.224,16.408 CN2.1 ; U5.10 38.862,1.6
  Bottom Layer w0.508: v2(38.862,8.001) 38.9,7.963 U6.10 ; v2(38.913,0.356) 38.926,0.343 U6.16 C13.1@43.021,0.343
USB_DM: R4.2 U7.32 | length 17.2
  Top Layer w0.152: v1(24.282,14.046) 24.611,14.375 U7.32
  Bottom Layer w0.152: R4.2 15.227,5.282 16.396,6.452 16.968,6.452 19.817,9.301 19.817,13.136 20.728,14.046 v1(24.282,14.046)
USB_DP: R2.2 U7.33 | length 16.8
  Top Layer w0.152: v1(24.333,14.875) U7.33
  Bottom Layer w0.152: R2.2 16.879,6.832 19.512,9.466 19.512,13.262 20.652,14.402 23.86,14.402 v1(24.333,14.875)
USB_UP_POWER: R1.1 U7.41 | length 15.7
  Top Layer w0.152: v1(22.218,15.665) U7.41
  Bottom Layer w0.152: R1.1 15.367,8.458 16.078,7.747 17.362,7.747 19.208,9.592 19.208,13.388 20.926,15.106 21.66,15.106 v1(22.218,15.665)
VBUS: C1.1 C2.1 CN1.1 D4.2 F1.2 LS1.1 U1.1 U1.3 U2.5 | length 59.3
  Top Layer w0.254: U1.1@9.677,8.001 v1(9.677,9.474) ; U1.3 11.136,5.943 11.43,6.238 11.43,7.575 11.157,7.848 U1.1
  Top Layer w0.508: LS1.1 6.438,22.715 7.843,21.311 v1(9.322,21.311) ; D4.2@7.62,18.381 9.089,18.381 9.322,18.148 ; C1.1 8.182,7.848 U1.1
  Top Layer w0.762: CN1.1 6.604,7.782 ; C2.1 C1.1 7.932,7.782 6.604,7.782 ; v1(9.322,21.311) 9.322,18.148 9.322,17.755 6.604,15.037 6.604,7.782 ; v2(29.134,19.71) 29.159,19.736 F1.2
  Bottom Layer w0.254: v1(9.677,9.474) 9.677,8.253 10.148,7.782 U2.5
  Bottom Layer w0.762: v1(9.322,21.311) 22.188,21.311 23.788,19.71 v2(29.134,19.71)
VCC: B1.1 C3.1 C10.2 C12.2 C14.2 C15.2 C16.2 C17.2 C18.2 C22.2 J1.2 R3.2 RP2.5 RP2.6 RP2.7 RP2.8 U1.5 U5.1 U5.7 U6.1 U6.7 U7.1 U7.9 U7.24 U7.36 U7.39 U7.48 U8.3 U8.7 U8.8 | length 122.2
  Top Layer w0.152: U7.9 18.623,12.375 v2@18.61,12.388 ; U7.1 v1(18.718,16.375) U7.48 ; v1(23.216,16.4) 23.218,16.403 U7.39 ; v1(24.186,10.693) 24.218,10.66 U7.24 ; U7.36 26.967,16.375 v1(26.975,16.383)
  Top Layer w0.254: B1.1 1.737,1.508 2.78,0.465 RP2.7 ; RP2.8 RP2.7 ; v2(17.327,4.744) 15.758,3.175 12.075,3.175 11.684,2.784 RP2.5 RP2.6 RP2.7
  Top Layer w0.508: U1.5 14.266,7.848 R3.2 16.351,7.674 C3.1@16.346,7.679 ; v2(16.129,8.661) 16.154,8.687 C3.1 C3.1@16.346,7.679 ; v2(17.327,4.744) 17.327,7.285 17.348,7.306 16.975,7.679 C3.1@16.346,7.679 ; v2(18.517,12.388) 18.61,12.388 19.666,12.388 v2(20.599,11.455) ; v1(28.143,17.602) 28.143,21.463 28.543,21.863 J1.2 ; v2(29.219,1.228) 29.591,1.228 29.963,1.6 U5.7 33.045,1.6 33.426,1.981 v2(33.426,7.95) 33.426,10.108 32.11,11.424 C10.2@31.561,11.424 ; U5.1@31.543,9.25 C10.2@31.543,11.424
  Bottom Layer w0.152: 23.876,11.355 23.892,11.371
  Bottom Layer w0.254: 15.367,2.513 U8.7
  Bottom Layer w0.508: v2(16.129,8.661) 17.479,8.661 18.517,9.699 v2(18.517,12.388) ; v2(17.327,4.744) 17.327,3.898 17.348,3.877 U8.8 16.014,3.783 15.367,3.136 15.367,2.513 15.367,-0.635 15.748,-1.016 20.345,-1.016 22.604,1.243 U8.3 26.13,1.243 C22.2 v2(29.219,1.228) 29.219,-0.275 29.235,-0.292 C12.2 29.952,-0.325 30.62,0.343 U6.1 ; v1@18.744,16.4 v1(18.718,16.375) 19.429,15.664 C18.2 20.038,15.697 20.861,15.697 21.565,16.4 v1(23.216,16.4) C17.2 26.272,16.4 ; v2(20.599,11.455) 21.279,11.455 21.33,11.506 C14.2@21.539,11.297 ; C14.2@21.539,11.432 25.275,11.432 26.221,12.377 26.221,16.349 26.272,16.4 ; C16.2@23.395,11.297 C16.2@23.47,11.371 ; v1(24.186,10.693) 24.186,11.413 ; v1(28.143,17.602) 28.067,17.526 28.092,17.501 v1(26.975,16.383) 26.957,16.4 26.272,16.4 ; U6.7 31.586,7.95 v2(33.426,7.95)
VCC3.5V: C9.1 D1.1 R6.2 U3.5 | length 9.6
  Top Layer w0.508: v2(43.536,7.644) 43.536,8.611 D1.1
  Bottom Layer w0.508: v2(43.536,7.644) 43.536,6.985 44.839,5.682 C9.1 45.645,4.786 46.113,4.318 R6.2 48.379,5.024 48.044,5.358
pads on no net: CN1.5 CN1.6 CN1.7 CN1.8 LS1.3 U7.2 U7.3 U7.4 U7.29 U7.38 Y1.2 Y1.4

## Polygon pours and split planes (outlines as drawn)
GND on Top Layer "GND_L01_P014" (solid, remove dead copper, pour order 14): -2.492,4.58 -2.492,-0.469 ccw(c-1.222,-0.469) -1.222,-1.739 35.262,-1.739 35.262,9.57 30.806,14.023 30.806,18.187 cw(c31.522,18.191) 31.013,18.694 cw(c31.567,18.163) 31.551,18.93 37.973,18.93 37.973,24.232 0.008,24.232 -1.23,24.238 ccw(c-1.23,22.968) -2.5,22.968 -2.5,17.882 0.5,17.882 0.5,4.58
EGND on Top Layer "EGND_L01_P018" (solid, remove dead copper, pour order 18): 36.768,-1.738 58.731,-1.738 ccw(c58.731,-0.469) 60,-0.469 60,22.968 ccw(c58.73,22.968) 58.73,24.238 48.473,24.238 48.473,12.167 37.871,12.167 37.871,17.407 32.313,17.407 32.313,14.388 ccw(c32.339,14.388) 32.339,14.362 36.522,10.179 36.541,10.179 cw(c35.917,9.554) 36.799,9.554 36.799,8.945
EGND on Bottom Layer "EGND_L02_P020" (solid, remove dead copper, pour order 20): 36.76,-1.749 58.723,-1.749 ccw(c58.723,-0.481) 59.991,-0.481 59.991,22.957 ccw(c58.721,22.957) 58.721,24.227 48.464,24.227 48.464,12.155 37.948,12.155 37.948,17.395 32.304,17.395 32.304,14.376 ccw(c32.33,14.376) 32.33,14.351 36.514,10.167 36.532,10.167 cw(c35.908,9.543) 36.791,9.543 36.791,8.933
GND on Bottom Layer "GND_L02_P016" (solid, remove dead copper, pour order 16): 37.973,24.232 37.973,18.923 37.287,18.93 31.546,18.93 ccw(c31.546,18.183) 31.018,18.711 ccw(c31.542,18.187) 30.801,18.187 30.801,14.043 35.257,9.59 35.257,-1.739 -1.227,-1.739 cw(c-1.227,-0.469) -2.497,-0.469 -2.497,4.58 0.495,4.58 0.495,17.881 -2.505,17.881 -2.505,22.968 cw(c-1.235,22.968) -1.235,24.238 0.003,24.232

## Keep-outs
Keep-Out Layer:
  lines w0.152: 37.973,24.238 37.973,12.7 ccw(c38.506,12.7) 38.506,12.167 48.057,12.167 ccw(c48.057,12.573) 48.463,12.573 48.463,24.238
  lines w0.254: 0.491,4.58 0.008,4.58 -2.492,4.58 -2.492,-0.594 ccw(c-1.347,-0.594) -1.347,-1.739 58.73,-1.739 ccw(c58.73,-0.469) 60,-0.469 60,22.968 ccw(c58.73,22.968) 58.73,24.238 -1.23,24.238 ccw(c-1.23,22.968) -2.5,22.968 -2.5,17.882 0,17.882 0.5,17.882 0.5,4.589 ; 60,0 60,22.5

## Other copper
Top Layer:
  rectangle net 5V_ISO: 36.195,12.948 37.592,14.747
  rectangle net NetC4_1: 31.547,19.075 36.855,20.498
  pour cut-out: 26.87,2.742 26.873,2.738 26.873,2.032 26.478,2.032 26.43,2.08 26.43,2.742
  pour cut-out: 26.87,2.742
  pour cut-out: 37.973,19 37.973,17.323 32.8,17.323 32.8,14.375 37.3,9.875 37.3,-1.739 34.9,-1.739 34.9,9.942 30.4,14.442 30.4,18.946 30.773,18.946 30.827,19
Bottom Layer:
  rectangle net 5V_ISO: 35.966,12.979 37.592,15.323
  rectangle net 5V_ISO: 34.493,14.479 37.059,15.443
  rectangle net NetC4_1: 32.487,19.202 35.611,20.168
  pour cut-out: 37.973,17.323 37.973,18.999 37.456,19 30.827,19 30.773,18.946 30.4,18.946 30.4,14.442 34.9,9.942 34.9,-1.739 37.3,-1.739 37.3,9.875 32.8,14.375 32.8,17.323
  pour cut-out: 6.36,9.201 6.465,9.201 6.465,7.638 7.123,6.981 7.662,6.981 7.662,8.217 7.69,8.245 7.69,8.481 7.37,8.481 6.842,9.008 6.842,10.164 5.886,11.12 5.587,11.12 5.587,9.974

## Silkscreen, mask and mechanical layers (free items; w line width, h text height)
Top Overlay:
  lines w0.152: 19.297,24.214 19.653,23.858 21.812,21.699 ; 19.729,22.233 20.263,21.699 ; 19.755,24.214 22.295,21.674 ; 19.856,22.614 20.796,21.674 ; 19.882,23.122 21.329,21.674 ; 20.288,24.214 22.828,21.674 ; 20.796,24.214 23.336,21.674 ; 21.329,24.214 23.844,21.699 ; 21.863,24.189 24.352,21.699 ; 22.396,24.189 24.911,21.674 ; 22.955,24.189 25.47,21.674 ; 23.463,24.189 25.954,21.698 ; 23.971,24.163 26.46,21.674 ; 24.479,24.189 26.994,21.674 ; 25.038,24.189 27.248,21.979 27.552,21.674 ; 25.546,24.189 27.324,22.411 28.06,21.674 ; 26.028,24.214 27.298,22.944 28.568,21.674 ; 26.562,24.214 27.298,23.477 ; 27.121,24.163 29.584,21.699 ; 27.273,21.699 27.273,24.214 ; 27.273,23.503 29.102,21.674 ; 27.629,24.163 29.762,22.03 ; 28.086,24.214 29.788,22.512 ; 28.619,24.163 29.788,22.995 ; 29.076,24.214 29.788,23.503 ; 29.788,21.699 29.788,24.239 ; 59.974,0.975 59.974,21.575
  lines w0.762: 19.484,23.219 ccw(c18.383,22.944) 19.499,23.152
  text "VDD" at 27.762,21.311 h0.91 r270
  text "GND" at 17.93,21.11 h0.91 r270
  text "3V3" at 52.399,15.638 h1.27
  text "SWDIO" at 50.072,13.132 h1.27
  text "SWCLK" at 49.911,10.668 h1.27
  text "NRST" at 51.128,8.215 h1.27
  text "GND" at 52.451,5.867 h1.27
  text "*" at 51.293,5.537 h1.52
  text "AT-Link-ISO V1.0" at 42.52,-0.737 h1.14
  text "1" at 20.312,-0.841 h1.27
  text "2" at 22.133,-0.841 h1.27
  text "3" at 23.954,-0.841 h1.27
  text "4" at 25.774,-0.841 h1.27
  text "LED:" at 16.383,-0.867 h1.27
Bottom Overlay:
  lines w0.152: 17.139,21.463 17.139,23.851
  text "START" at 16.612,21.336 h0.91 r45
  text "M-NRST" at 21.641,21.26 h0.91 r45
  text "M-SWD" at 26.645,21.26 h0.91 r45
  text "BUSY" at 13.868,21.219 h0.91 r45
  text "M-SWC" at 24.232,21.234 h0.91 r45
  text "PASS" at 11.328,21.209 h0.91 r45
  text "GND" at 18.948,21.209 h0.91 r45
  text "VDD" at 29.261,21.184 h0.91 r45
  text "FAIL" at 8.89,21.158 h0.91 r45
  text "M-BOOT0" at 31.852,21.158 h0.91 r45
  text "E5V" at 55.474,15.621 h1.27
  text "BOOT0" at 55.474,13.132 h1.27
  text "SWO" at 55.474,10.693 h1.27
  text "TX" at 55.474,8.001 h1.27
  text "RX" at 55.474,5.588 h1.27
Mechanical 1:
  lines w0.102: 37.973,24.238 37.973,12.7 ccw(c38.506,12.7) 38.506,12.167 48.041,12.167 ccw(c48.041,12.598) 48.473,12.598 48.473,24.223 ; -2.5,17.882 -2.5,22.968 cw(c-1.23,22.968) -1.23,24.238 56.236,24.238 58.73,24.238 cw(c58.73,22.968) 60,22.968 60,-0.469 cw(c58.73,-0.469) 58.73,-1.739 57.912,-1.739 -1.222,-1.739 cw(c-1.222,-0.469) -2.492,-0.469 -2.492,0 -2.492,4.58 0.008,4.58 0.5,4.58 0.5,17.882 0,17.882 -2.5,17.882
  lines w0.152: 37.948,17.686 34.267,17.686 34.267,18.573 37.948,18.573
Drill Drawing:
  circle w0.102: c76.123,10.679 r0.423
  lines w0.102: 75.7,4.541 76.546,4.541 76.546,5.388 75.7,5.388 75.7,4.541 ; 75.7,6.658 75.911,6.658 75.911,6.446 76.335,6.446 76.335,6.658 76.546,6.658 76.546,7.081 76.335,7.081 76.335,7.293 75.911,7.293 75.911,7.081 75.7,7.081 75.7,6.658 ; 75.7,12.161 76.123,12.373 76.546,12.161 76.335,12.584 76.546,13.008 76.123,12.796 75.7,13.008 75.911,12.584 75.7,12.161 ; 75.7,14.278 75.911,14.278 76.123,14.066 76.335,14.278 76.546,14.278 76.335,14.489 76.546,14.701 76.335,14.701 76.123,14.913 75.911,14.701 75.7,14.701 75.911,14.489 75.7,14.278 ; 75.7,16.818 76.546,16.818 76.123,15.971 75.7,16.818
  lines w0.254: 74.948,3.969 186.904,3.969 ; 74.948,17.304 186.904,17.304 ; 81.25,2.064 81.25,19.209 ; 87.265,2.064 87.265,19.209 ; 99.32,2.064 99.32,19.209 ; 104.28,2.064 104.28,19.209 ; 111.682,2.064 111.682,19.209 ; 127.285,2.064 127.285,19.209 ; 133.442,2.064 133.442,19.209 ; 141.514,2.064 141.514,19.209 ; 152.347,2.064 152.347,19.209 ; 160.28,2.064 160.28,19.209 ; 173.306,2.064 173.306,19.209 ; 74.948,2.064 186.904,2.064 186.904,19.209 74.948,19.209 74.948,2.064
  text "Symbol" at 76.091,17.876 h0.91
  text "Count" at 81.821,17.876 h0.91
  text "Hole Size" at 87.836,17.876 h0.91
  text "Plated" at 99.892,17.876 h0.91
  text "Hole Type" at 104.851,17.876 h0.91
  text "Drill Layer Pair" at 112.253,17.876 h0.91
  text "Via/Pad" at 127.856,17.876 h0.91
  text "Pad Shape" at 134.013,17.876 h0.91
  text "Template" at 142.085,17.876 h0.91
  text "Description" at 152.918,17.876 h0.91
  text "Hole Tolerance (+)" at 160.851,17.876 h0.91
  text "Hole Tolerance (-)" at 173.877,17.876 h0.91
  text "2" at 81.821,15.971 h0.76
  text "0.520mm (20.47mil)" at 87.836,15.971 h0.76
  text "PTH" at 99.892,15.971 h0.76
  text "Slot" at 104.851,15.971 h0.76
  text "Top Layer - Bottom Layer" at 112.253,15.971 h0.76
  text "Pad" at 127.856,15.971 h0.76
  text "Rectangle" at 134.013,15.971 h0.76
  text "r120_300h52_230" at 142.085,15.971 h0.76
  text "2" at 81.821,14.066 h0.76
  text "1.500mm (59.06mil)" at 87.836,14.066 h0.76
  text "PTH" at 99.892,14.066 h0.76
  text "Round" at 104.851,14.066 h0.76
  text "Top Layer - Bottom Layer" at 112.253,14.066 h0.76
  text "Pad" at 127.856,14.066 h0.76
  text "Rounded" at 134.013,14.066 h0.76
  text "c150h150" at 142.085,14.066 h0.76
  text "2" at 81.821,12.161 h0.76
  text "2.000mm (78.74mil)" at 87.836,12.161 h0.76
  text "PTH" at 99.892,12.161 h0.76
  text "Round" at 104.851,12.161 h0.76
  text "Top Layer - Bottom Layer" at 112.253,12.161 h0.76
  text "Pad" at 127.856,12.161 h0.76
  text "Rounded" at 134.013,12.161 h0.76
  text "c200h200" at 142.085,12.161 h0.76
  text "4" at 81.821,10.256 h0.76
  text "1.000mm (39.37mil)" at 87.836,10.256 h0.76
  text "PTH" at 99.892,10.256 h0.76
  text "Round" at 104.851,10.256 h0.76
  text "Top Layer - Bottom Layer" at 112.253,10.256 h0.76
  text "Pad" at 127.856,10.256 h0.76
  text "Rounded" at 134.013,10.256 h0.76
  text "c150h100" at 142.085,10.256 h0.76
  text "10" at 81.821,8.351 h0.76
  text "0.900mm (35.43mil)" at 87.836,8.351 h0.76
  text "PTH" at 99.892,8.351 h0.76
  text "Round" at 104.851,8.351 h0.76
  text "Top Layer - Bottom Layer" at 112.253,8.351 h0.76
  text "Pad" at 127.856,8.351 h0.76
  text "(Mixed)" at 134.013,8.351 h0.76
  text "(Mixed)" at 142.085,8.351 h0.76
  text "A" at 75.739,8.249 h0.85
  text "11" at 81.821,6.446 h0.76
  text "0.500mm (19.69mil)" at 87.836,6.446 h0.76
  text "PTH" at 99.892,6.446 h0.76
  text "Round" at 104.851,6.446 h0.76
  text "Top Layer - Bottom Layer" at 112.253,6.446 h0.76
  text "Via" at 127.856,6.446 h0.76
  text "Rounded" at 134.013,6.446 h0.76
  text "(Mixed)" at 142.085,6.446 h0.76
  text "180" at 81.821,4.541 h0.76
  text "0.300mm (11.81mil)" at 87.836,4.541 h0.76
  text "PTH" at 99.892,4.541 h0.76
  text "Round" at 104.851,4.541 h0.76
  text "Top Layer - Bottom Layer" at 112.253,4.541 h0.76
  text "Via" at 127.856,4.541 h0.76
  text "Rounded" at 134.013,4.541 h0.76
  text "v60h30m0mx0" at 142.085,4.541 h0.76
  text "211 Total" at 81.821,2.636 h0.76
  text "Slot definitions :" at 76.091,0.845 h0.76
  text "Routed Path Length" at 85.36,0.845 h0.76
  text "= Calculated from tool start centre position to tool end centre position." at 96.432,0.845 h0.76
  text "Hole Length" at 85.36,-0.374 h0.76
  text "= Routed Path Length + Tool Size = Slot length as defined in the PCB layout" at 92.082,-0.374 h0.76